# Altium PCB MPU6050_v2_PCB.PcbDoc
Units mm, origin at the board's own origin, x right, y up, seen from the top; angles counter-clockwise.
Board outline 22.5 x 38.5 mm, 2 copper layers (Top Layer, Bottom Layer), stack 1.571 mm thick; 15 components, 10 nets, 61 pads, 8 vias.
Unrouted connection lines stored in the file: 1.
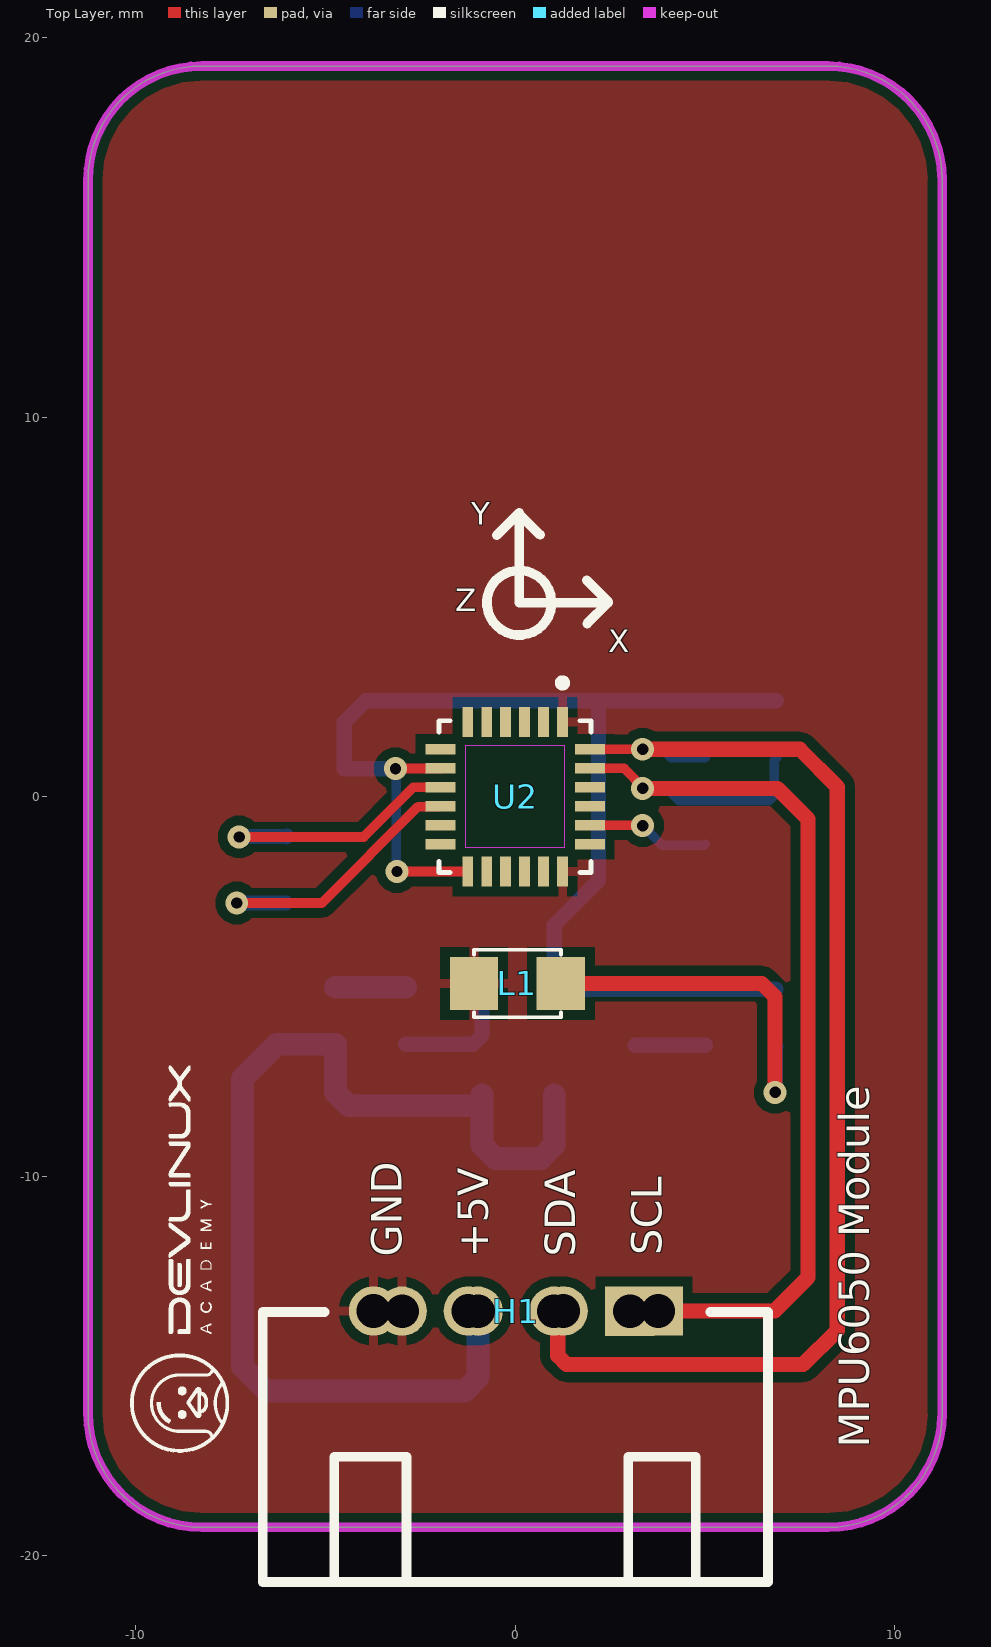
[diagram p0: Top Layer view]
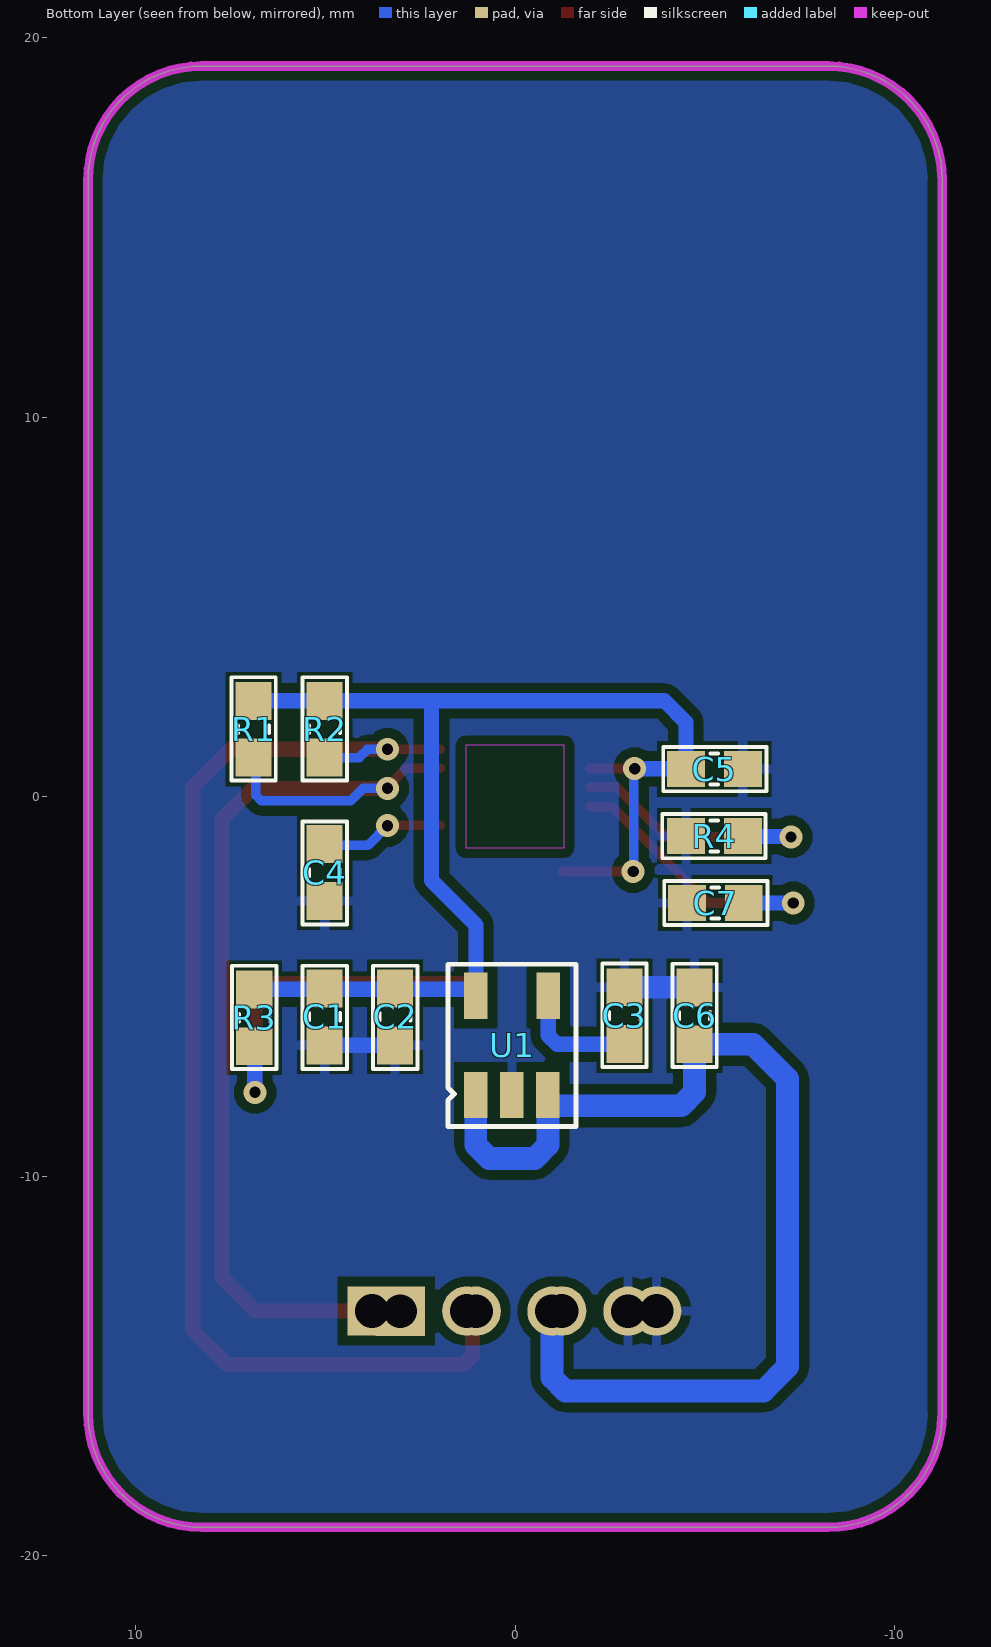
[diagram p1: Bottom Layer view, seen from below]
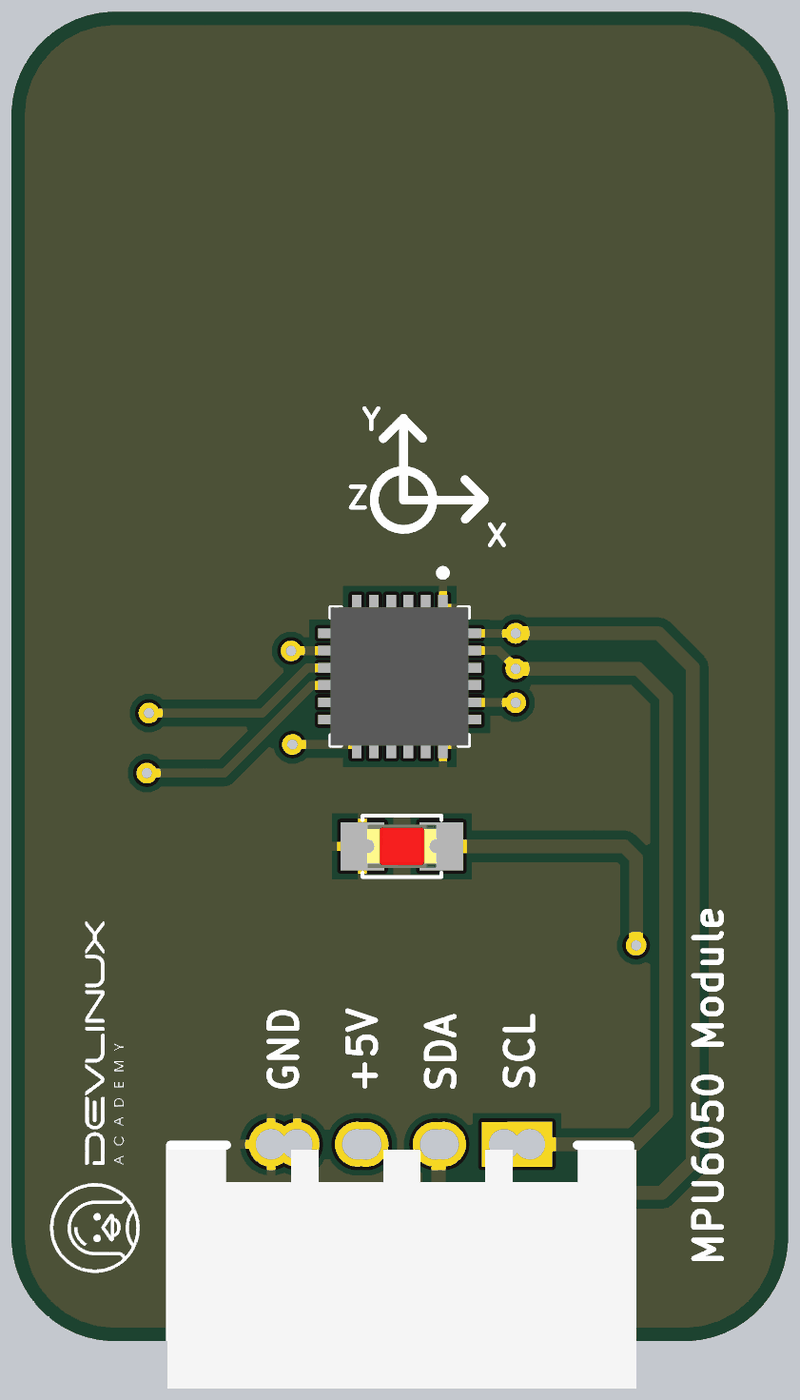
[diagram p2: 3D render of the assembled board from above, using the file's embedded part models]
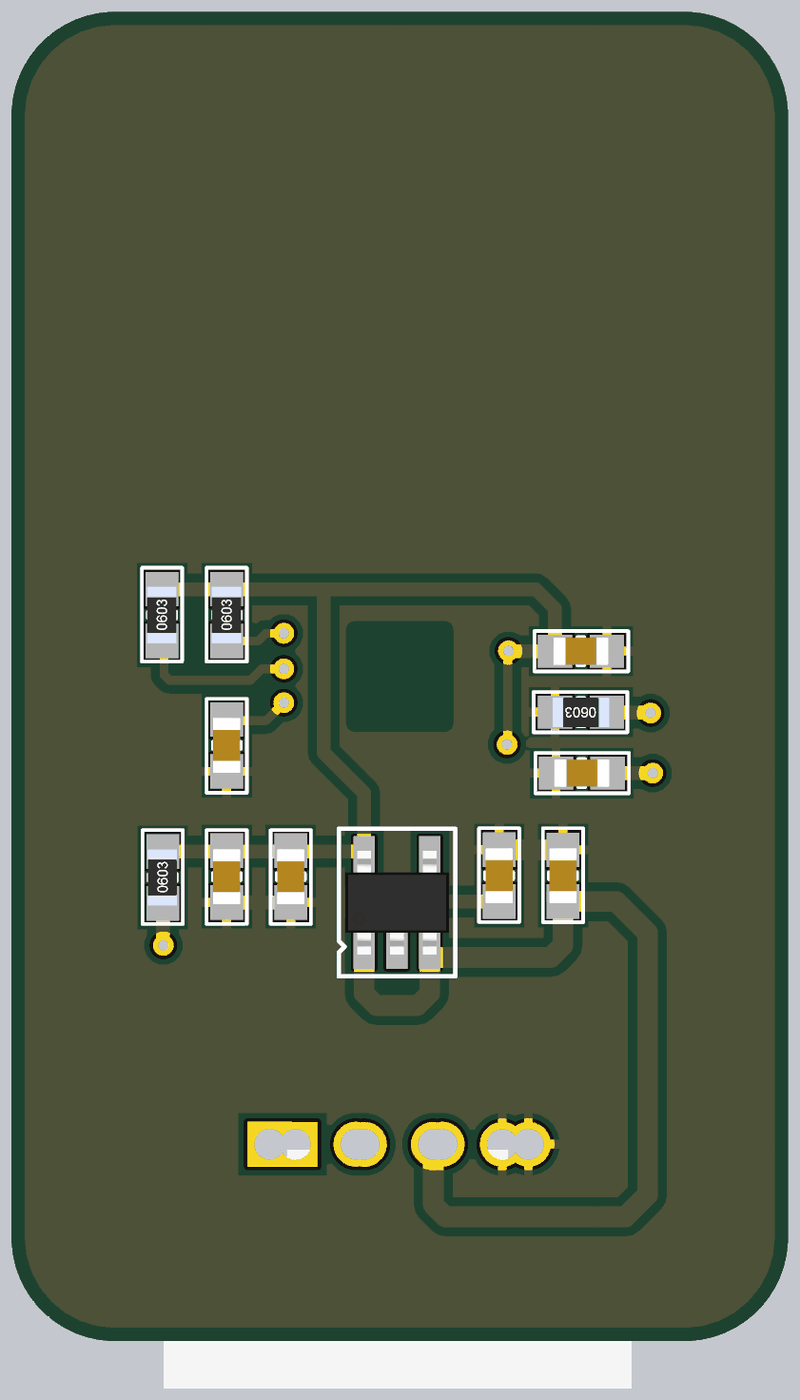
[diagram p3: 3D render of the assembled board from below, using the file's embedded part models]

## Layer stack, top to bottom
Top Solder: solder mask 0.0102, Solder Resist, Dk 3.5
Top Layer: signal copper 0.0356
Dielectric 1: dielectric 1.5, FR-4, Dk 4.8
Bottom Layer: signal copper 0.0356
Bottom Solder: solder mask 0.0102, Solder Resist, Dk 3.5

## Board outline
-11.25,-16.25 -11.25,16.25 cw(c-8.25,16.25) -8.25,19.25 8.25,19.25 cw(c8.25,16.25) 11.25,16.25 11.25,-16.25 cw(c8.25,-16.25) 8.25,-19.25 -8.25,-19.25 cw(c-8.25,-16.25)

## Design rules (kind name [scope] priority, off if disabled: settings)
Clearance [All] p1: gap=0.254 ignorepadtopadclearanceinfootprint=FALSE except(0: Arc-Hole Track-Hole SMDPad-Hole THPad-Hole Via-Hole Fill-Hole Poly-Hole Region-Hole Text-Hole; 0.178: Arc-Arc Arc-Track Arc-SMDPad Arc-THPad Track-Track Track-SMDPad Track-THPad SMDPad-SMDPad SMDPad-THPad THPad-THPad)
PolygonConnect [All] p1: connectstyle=Relief reliefconductorwidth=0.254 reliefentries=4 polygonreliefangle="90 Angle" airgapwidth=0.254
RoomDefinition MPU6050_v2 [InComponentClass('MPU6050_v2')] p1: confinementstyle=ConfineIn formatcopy=TRUE lockcomponents=FALSE outline -30.236,-43.226 50.536,-43.226 50.536,-25.065 -30.236,-25.065
RoutingVias [All] p1: holewidth=0.4 width=0.8 viastyle="Through Hole" minholewidth=0.3 minwidth=0.6 maxholewidth=0.5 maxwidth=1
SolderMaskExpansion [All] p1: expansion=0.102 istentingtop=FALSE
Width [All] p1: maxlimit=0.6 minlimit=0.254 preferedwidth=0.4
30 further rules are at their usual default settings.

## Components (designator, comment, footprint, x,y, rotation, side; value= is the part's Value field where it differs from the comment)
C1 "10uF" "tu 0603" 5.014,-5.798 r270 bottom
C2 "100nF" "tu 0603" 3.159,-5.798 r270 bottom
C3 "22nF" "tu 0603" -2.88,-5.77 r90 bottom
C4 "2.2nF" "tu 0603" 5.014,-1.998 r270 bottom
C5 "100nF" "tu 0603" -5.25,0.73 r180 bottom
C6 "100nF" "tu 0603" -4.73,-5.771 r90 bottom
C7 "100nF" "tu 0603" -5.275,-2.8 r180 bottom
H1 "Header 4P 2.54 + 2.0 Duc Cong" "Header 4P DC 2.54 + 2.0" 3.745,-13.575 r270 top
L1 "LED RED" LED-0805-Red 1.206,-4.92 r180 top
R1 "4.7k" "tro smd 0603" 6.89,1.778 r90 bottom
R2 "4.7k" "tro smd 0603" 5.014,1.778 r90 bottom
R3 "470" "tro smd 0603" 6.87,-5.823 r90 bottom
R4 "4.7k" "tro smd 0603" -5.25,-1.035 r0 bottom
U1 "RT9193-33GB" SOT23-5 0.08,-6.55 r180 bottom
U2 "MPU-6050-A" QFN50P400X400X95-24N 0,0 r270 top

## Footprints (in the part's own frame and the unit in brackets; to place one, negate y for a bottom-side part, rotate by r counter-clockwise, add the part's x,y. Pads: shape width x height; smd on the part's side, far side on the other; paste and mask are expansions set on the pad)
"Header 4P DC 2.54 + 2.0" [mm]
  rect 1.3x1.3 hole 0.889: 1(-0.025,0.025) 1(-0.022,-0.719)
  round 1.3 hole 0.889: 2(-0.025,-2.475) 2(-0.022,-2.719) 3(-0.025,-4.975) 3(-0.022,-4.719) 4(-0.025,-7.475) 4(-0.022,-6.718)
  silkscreen extent 0,-10.39 7.11,2.92, body extent 0.13,-10.48 7.06,3.11, height 7.38
LED-0805-Red [mil]
  rect 50x55 smd: 1(0,0) 2(90,0)
  silkscreen extent 0,-35 90,35, body extent 5,-25 85,25, height 43
QFN50P400X400X95-24N [mm]
  rect 0.79x0.28 smd: 1(-1.97,1.25) 2(-1.97,0.75) 3(-1.97,0.25) 4(-1.97,-0.25) 5(-1.97,-0.75) 6(-1.97,-1.25) 13(1.97,-1.25) 14(1.97,-0.75) 15(1.97,-0.25) 16(1.97,0.25) 17(1.97,0.75) 18(1.97,1.25)
  rect 0.28x0.79 smd: 7(-1.25,-1.97) 8(-0.75,-1.97) 9(-0.25,-1.97) 10(0.25,-1.97) 11(0.75,-1.97) 12(1.25,-1.97) 19(1.25,1.97) 20(0.75,1.97) 21(0.25,1.97) 22(-0.25,1.97) 23(-0.75,1.97) 24(-1.25,1.97)
  Keep-Out Layer region: 1.35,-1.3 -1.35,-1.3 -1.35,1.3 1.35,1.3
  silkscreen extent -3.1,-2 2,2, body extent -2,-2.01 2,1.99, height 0.93
SOT23-5 [mm] "CASE: SOT"
  rect 0.62x1.22 smd mask+0.076: 1(-0.953,-1.31) 2(-0.003,-1.31) 3(0.947,-1.31) 4(0.952,1.31) 5(-0.953,1.31)
  silkscreen extent -1.69,-2.14 1.69,2.14, body extent -1.5,-1.5 1.5,1.5, height 1.41
"tro smd 0603" [mm] "Chip Capacitor, 2-Leads, Body 1,60x0,80mm, IPC Medium Density"
  rect 1x0.95 smd mask+0.076: 1(-0.75,0) 2(0.75,0)
  silkscreen extent -1.35,-0.58 1.37,0.58, body extent -0.82,-0.42 0.82,0.43, height 0.44
"tu 0603" [mm] "Chip Capacitor, 2-Leads, Body 1,60x0,80mm, IPC Medium Density"
  rect 1x0.95 smd mask+0.076: 1(-0.75,0) 2(0.75,0)
  silkscreen extent -1.35,-0.58 1.37,0.58, body extent -0.8,-0.4 0.8,0.4, height 0.9

## Part data
C1: library part "Tu 0603 106 16V 20%", "Dán", Chung_Loai=Dán, Don_Vi=Con, Ma_Hang=MH004848, So_Chan=2, Ten_Linh_Kien="Tụ 0603-10uF 20% 16V"
C2 C3 C4 C5 C6 C7: library part "Tu 0603 104 50V 10%", "Dán", Chung_Loai=Dán, Don_Vi=Con, Ma_Hang=MH004568, So_Chan=2, Ten_Linh_Kien="Tụ 0603 104-100nF 10% 50V"
H1: "Cắm", Chung_Loai=Cắm, Don_Vi=Con, Ma_Hang=MH001310, Ten_Linh_Kien="Header 4P XH2.54-4P Đực Cong"
L1: library part "LED 0805 Do", "Dán", Chung_Loai=Dán, Don_Vi=Con, Ma_Hang=MH000897, Ten_Linh_Kien="LED 0805 Màu Đỏ (Red)"
R1 R2 R4: library part "Tro 0603 5% 4.7k", "Dán", Chung_Loai=Dán, Don_Vi=Con, Ma_Hang=MH006327, So_Chan=2, Ten_Linh_Kien="Trở 0603 5% 4.7k"
R3: library part "Tro 0603 1% 1k", "Dán", Chung_Loai=Dán, Don_Vi=Con, Ma_Hang=MH006334, So_Chan=2, Ten_Linh_Kien="Trở 0603 1% 1k"
U1: library part REG_5.5V-3.3V-0.3A-1W-SOT-23-5, "Linear Voltage Regulator IC 1 Output 300mA SOT-23-5", Alternate Part Number-1=NA, Case/Package=SOT-23-5, Manufacturer="Richtek USA Inc.", Supplier Part Number-1=C15651, Manufacturer Part Number=RT9193-33GB, Supplier-1=LCSC
U2: Package=None, Check_prices=https://www.snapeda.com/parts/MPU-6050-A/InvenSense/view-part/?ref=eda, MF="TDK InvenSense", MP=MPU-6050-A, SnapEDA_Link=https://www.snapeda.com/parts/MPU-6050-A/InvenSense/view-part/?ref=snap

## Via types
v1: diameter 0.6, hole 0.3, Top Layer to Bottom Layer, 8 vias

## Nets (pads, with @x,y where several pads share a name; then routed paths per layer and width w, separated by ;. In a path a pad name is that pad's centre, name@x,y a point inside that pad or via, vN(x,y) a via of type N, cw(c..) or ccw(c..) an arc to the next point about the centre after c; other vN are vias at no path point)
+3V3: C1.1 C2.1 C5.1 R1.2 R2.2 R3.2 U1.5 U2.8 U2.13 | length 34.1
  Top Layer w0.254: v1(-3.15,0.74) -3.145,0.745 -1.975,0.745 U2.8 ; v1(-3.11,-1.97) U2.13
  Bottom Layer w0.254: v1(-3.15,0.74) -3.13,0.72 -3.13,-1.95 v1(-3.11,-1.97)
  Bottom Layer w0.4: v1(-3.15,0.74) -3.155,0.735 -4.495,0.735 C5.1 -4.5,1.96 -3.932,2.528 2.2,2.528 ; U1.5 U1.5@1.033,-5.183 ; R3.2 5.014,-5.073 3.159,-5.073 1.143,-5.073 U1.5@1.033,-5.183 ; R1.2 R2.2 2.2,2.528 ; U1.5@1.033,-5.183 1.033,-3.377 2.2,-2.21 2.2,2.528
+5: C6.1 H1.3 U1.1 U1.3 | length 28.9
  Bottom Layer w0.6: H1.3@-0.974,-13.553 -0.974,-15.303 -1.326,-15.654 -6.546,-15.654 -7.18,-15.02 -7.18,-7.43 -6.271,-6.521 C6.1 -4.73,-7.789 -4.379,-8.14 -0.877,-8.14 U1.3@-0.867,-8.13 ; U1.3 U1.3@-0.867,-8.13 ; U1.1 1.033,-9.179 0.681,-9.53 -0.516,-9.53 -0.867,-9.179 U1.3@-0.867,-8.13
GND: C1.2 C2.2 C3.2 C4.2 C5.2 C6.2 C7.1 H1.4 L1.2 R4.2 U1.2 U2.1 U2.11 U2.18 | length 3.7
  Bottom Layer w0.4: C2.2 C1.2
  Bottom Layer w0.6: C6.2 C3.2@-2.881,-5.021
NetC3_1: C3.1 U1.4 | length 3.2
  Bottom Layer w0.4: C3.1 -1.107,-6.52 -0.872,-6.286 U1.4
NetC4_1: C4.1 U2.20 | length 3.3
  Top Layer w0.254: U2.20 3.35,-0.75 v1(3.36,-0.76)
  Bottom Layer w0.254: v1(3.36,-0.76) 3.88,-1.28 4.982,-1.28 C4.1
NetC7_2: C7.2 U2.10 | length 7.7
  Top Layer w0.254: v1(-7.33,-2.8) -5.09,-2.8 -2.553,-0.263 -1.983,-0.263 U2.10
  Bottom Layer w0.4: v1(-7.33,-2.8) C7.2
NetL1_1: L1.1 R3.1 | length 9.5
  Top Layer w0.4: L1.1 6.5,-4.92 6.85,-5.27 v1(6.85,-7.79)
  Bottom Layer w0.4: v1(6.85,-7.79) 6.86,-7.78 6.86,-6.583 R3.1
NetR4_1: R4.1 U2.9 | length 7.1
  Top Layer w0.254: v1(-7.27,-1.06) -3.987,-1.06 -2.677,0.25 U2.9
  Bottom Layer w0.4: v1(-7.27,-1.06) -7.257,-1.047 -6.038,-1.047 -6.025,-1.06 R4.1
SCL: H1.1 R1.1 U2.23 | length 27.4
  Top Layer w0.254: U2.23 2.87,0.75 v1@3.4,0.22
  Top Layer w0.4: v1(3.36,0.22) 3.4,0.22 6.912,0.22 7.72,-0.588 7.72,-12.67 6.84,-13.55 H1.1@3.77,-13.55
  Bottom Layer w0.254: v1(3.36,0.22) 4,0.22 4.33,-0.11 6.682,-0.11 6.831,0.039 6.831,0.969 R1.1
SDA: H1.2 R2.1 U2.24 | length 32
  Top Layer w0.254: U2.24 v1(3.36,1.25)
  Top Layer w0.4: H1.2@1.026,-13.553 1.123,-13.651 1.123,-14.726 1.358,-14.96 7.59,-14.96 8.49,-14.06 8.49,0.26 7.5,1.25 v1(3.36,1.25)
  Bottom Layer w0.254: v1@3.38,1.25 3.89,1.25 4.112,1.028 R2.1
pads on no net: U2.2 U2.3 U2.4 U2.5 U2.6 U2.7 U2.12 U2.14 U2.15 U2.16 U2.17 U2.19 U2.21 U2.22

## Polygon pours and split planes (outlines as drawn)
GND on Top Layer "NONET_L-01_P-001" (solid, remove dead copper, pour order 0): -12.02,21.43 -11.71,21.12 15.55,21.12 15.55,-23.09 14.32,-21.86 -11.41,-21.86
GND on Bottom Layer "NONET_L-01_P-001" (solid, remove dead copper, pour order 1): -10.82,21.89 13.86,21.89 14.86,20.89 14.86,-19.29 -11.31,-19.29 -13.05,-21.03

## Keep-outs
Keep-Out Layer:
  the board outline again, w0.254

## Silkscreen, mask and mechanical layers (free items; w line width, h text height)
Top Overlay:
  drawing of 28 lines, arcs and shapes, not listed
  text "Y" at -1.16,7.16 h0.6
  text "Z" at -1.58,4.89 h0.6
  text "X" at 2.45,3.8 h0.6
  text "SCL" at 3.86,-12.08 h0.8 r90
  text "GND" at -2.98,-12.12 h0.8 r90
  text "SDA" at 1.58,-12.12 h0.8 r90
  text "+5V" at -0.7,-12.15 h0.8 r90
  text "MPU6050 Module" at 9.33,-17.15 h0.8 r90